# EAGLE board vga3 (EAGLE 7.3.0)
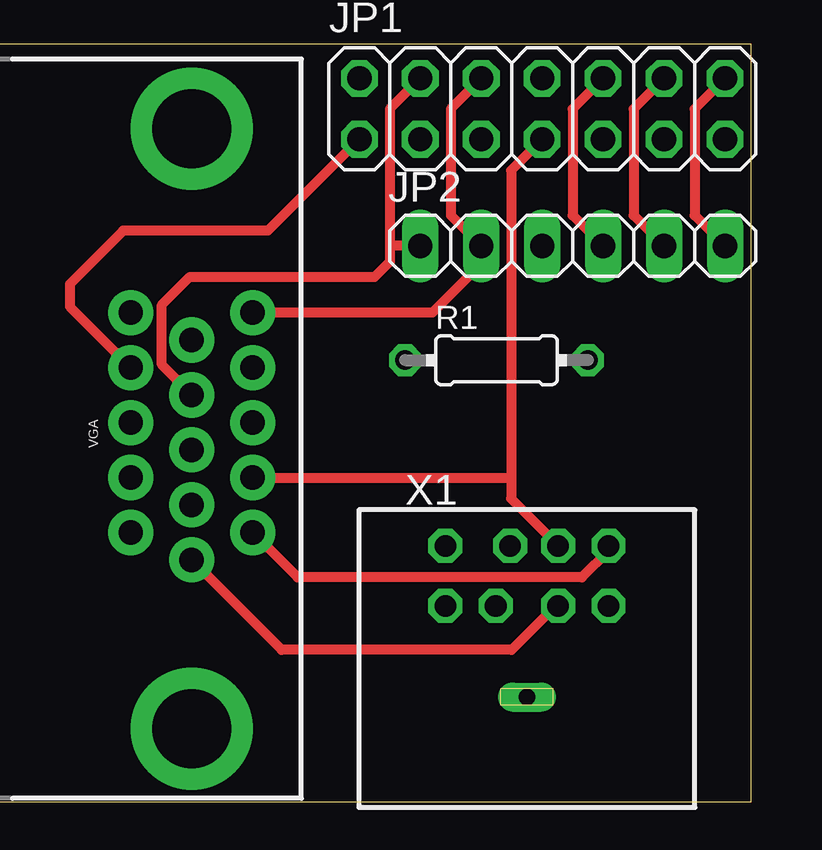
[diagram p0: board, top side]
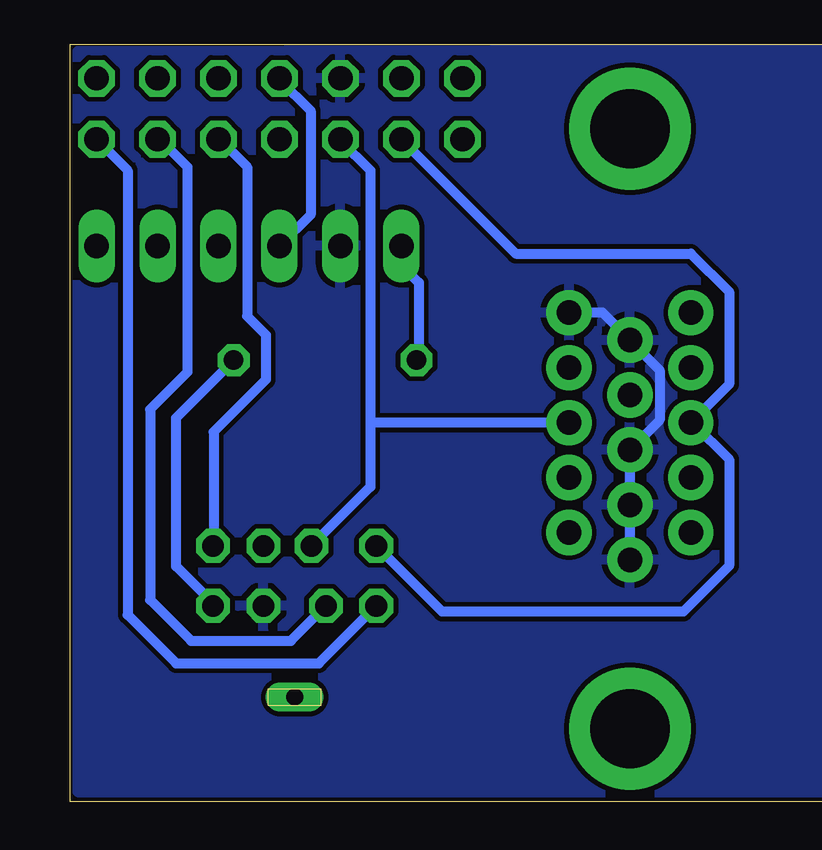
[diagram p1: board, bottom side, seen from below]

No outline drawn. Coordinates in mm, seen from the top.
Copper layers (1*16): Top 0.035mm / dielectric 1.5mm / Bottom 0.035mm
Design rules "default": minimum track width 10mil, minimum drill 24mil, track to track 8mil, track to pad 8mil, pad to pad 8mil, via to via 8mil, smd to smd 8mil, copper to edge 40mil, drill to drill 8mil, minimum pad ring 10mil, minimum via ring 8mil, stop-mask expansion 4mil, vias tented up to drill 0mil, thermal gap 10mil
Milling: 4 lines

## Footprints (pad centres in the part's own frame; a part is rotated, then mirrored left to right if it is on the bottom)
2X07 = drill 1.016 octagon: 1 -7.62,-1.27; 2 -7.62,1.27; 3 -5.08,-1.27; 4 -5.08,1.27; 5 -2.54,-1.27; 6 -2.54,1.27; 7 0,-1.27; 8 0,1.27; 9 2.54,-1.27; 10 2.54,1.27; 11 5.08,-1.27; 12 5.08,1.27; 13 7.62,-1.27; 14 7.62,1.27
1X06 = drill 1.016 long: 1 -6.35,0; 2 -3.81,0; 3 -1.27,0; 4 1.27,0; 5 3.81,0; 6 6.35,0
0204/7 = drill 0.813 octagon: 1 -3.81,0; 2 3.81,0
DB15 = drill 1.016 pad 1.88: 1 -4.32,-7.62; 2 -2.03,-7.62; 3 0.26,-7.62; 4 2.55,-7.62; 5 4.84,-7.62; 6 -5.46,-5.08; 7 -3.17,-5.08; 8 -0.88,-5.08; 9 1.41,-5.08; 10 3.7,-5.08; 11 -4.32,-2.54; 12 -2.03,-2.54; 13 0.26,-2.54; 14 2.55,-2.54; 15 4.84,-2.54 | drill 3.302 pad 5.08: G1 -12.5,-5.08; G2 12.5,-5.08
MDIN08S = drill 0.9 octagon: 1 1.3,8.5; 2 -1.3,8.5; 3 3.4,8.5; 4 1.3,11; 5 -3.4,8.5; 6 3.4,11; 7 -0.7,11; 8 -3.4,11 | drill 0.7 long: M 0,4.7

## Placement (x,y rotation side)
JP1  RGB/JTAG  [2X07]  26.19,28.86 0 top
JP2  JTAG  [1X06]  27.46,23.15 0 top
R1  100  [0204/7]  24.29,18.39 0 top
VGA  DB15  [DB15]  6.51,15.53 90 top
X1  [MDIN08S]  25.56,-0.35 0 top

## Library data of the parts
JP1 JP2 = pinhead
R1 = rcl
VGA = SparkFun-Connectors
X1 = con-yamaichi; OC_FARNELL: unknown; OC_NEWARK: unknown

## Nets
3.3V: JP1.4 JP2.1 R1.1 VGA.9
BLUE: JP1.5 VGA.3 X1.7
CSYNC: JP1.3 VGA.13 X1.8
GND: JP1.6 JP2.2 VGA.5 VGA.6 VGA.7 VGA.8 VGA.10 X1.1
GREEN: JP1.7 VGA.2 X1.4
L-OUT: JP1.13 X1.5
N$2: R1.2 X1.3
R-OUT: JP1.11 X1.2
RED: JP1.9 VGA.1 X1.6
TCK: JP1.8 JP2.3
TDI: JP1.12 JP2.5
TDO: JP1.10 JP2.4
TMS: JP1.14 JP2.6
VSYNC: JP1.1 VGA.14

## Tracks (layer width: path | path; a pad name or v marks a point on that pad's centre or on a via)
3.3V
  Top 0.406: JP1.4 19.84,28.86 19.84,23.18 | 19.84,23.18 19.84,22.48 19.21,21.86 11.51,21.86 10.35,20.69 10.35,18.2 11.59,16.96 VGA.9 | JP2.1 19.87,23.15 19.84,23.18
  Bottom 0.406: R1.1 20.38,18.48 20.38,21.62 21.11,22.36 JP2.1
BLUE
  Bottom 0.406: JP1.5 23.65,27.54 22.4,26.29 22.4,15.87 | 22.4,15.87 22.4,13.11 X1.7 | VGA.3 22.32,15.79 22.4,15.87
CSYNC
  Bottom 0.406: JP1.3 16.35,22.83 9.05,22.83 7.46,21.24 7.46,17.38 VGA.13 8.99,15.79 7.46,14.26 7.46,9.81 9.36,7.91 19.41,7.91 X1.8
GND
  Top 0.406: JP1.6 22.38,28.86 22.38,24.42 JP2.2 23.49,22.99 23.49,22.25 21.61,20.37 VGA.5 | X1.1 26.75,8.15 24.92,6.32 15.33,6.32 VGA.6
  Bottom 0.406: VGA.6 VGA.7 VGA.8 10.35,15.89 10.35,17.97 11.59,19.21 VGA.10 12.73,20.37 VGA.5
  pour Bottom: 34.62,31.27 34.62,0.39 0.23,0.39 0.23,31.35
GREEN
  Top 0.406: JP1.7 24.89,26.29 24.89,13.38 | 24.89,13.38 24.89,12.62 X1.4 | VGA.2 24.77,13.5 24.89,13.38
L-OUT
  Bottom 0.406: JP1.13 32.52,26.29 32.52,7.78 30.49,5.76 24.55,5.76 X1.5
N$2
  Bottom 0.406: X1.3 28.96,8.26 30.49,9.8 30.49,15.99 R1.2
R-OUT
  Bottom 0.406: JP1.11 31.17,27.59 30.03,26.45 30.03,17.89 31.58,16.34 31.58,8.4 29.87,6.69 25.72,6.69 X1.2
RED
  Top 0.406: X1.6 28.96,10.44 27.85,9.34 16,9.34 VGA.1
  Bottom 0.406: JP1.9 28.68,27.59 27.54,26.45 27.54,20.23 26.76,19.45 26.76,17.58 28.94,15.4 28.94,10.67 X1.6
TCK
  Bottom 0.406: JP1.8 26.19,30.08 24.89,28.78 24.89,24.45 JP2.3
TDI
  Top 0.406: JP1.12 30,28.86 30,24.42 JP2.5
TDO
  Top 0.406: JP1.10 27.46,28.86 27.46,24.42 JP2.4
TMS
  Top 0.406: JP1.14 32.54,28.86 32.54,24.42 JP2.6
VSYNC
  Top 0.406: VGA.14 6.51,20.62 6.51,21.56 8.73,23.78 14.76,23.78 JP1.1